# Altium PCB PCB1.PcbDoc (part 1 of 2)
Units mil, origin at the board's own origin, x right, y up, seen from the top; angles counter-clockwise.
Board outline 4538.24 x 3362.8 mil, 2 copper layers (Top Layer, Bottom Layer); 199 components, 229 nets, 1313 pads, 0 vias.
Unrouted connection lines stored in the file: 1024.
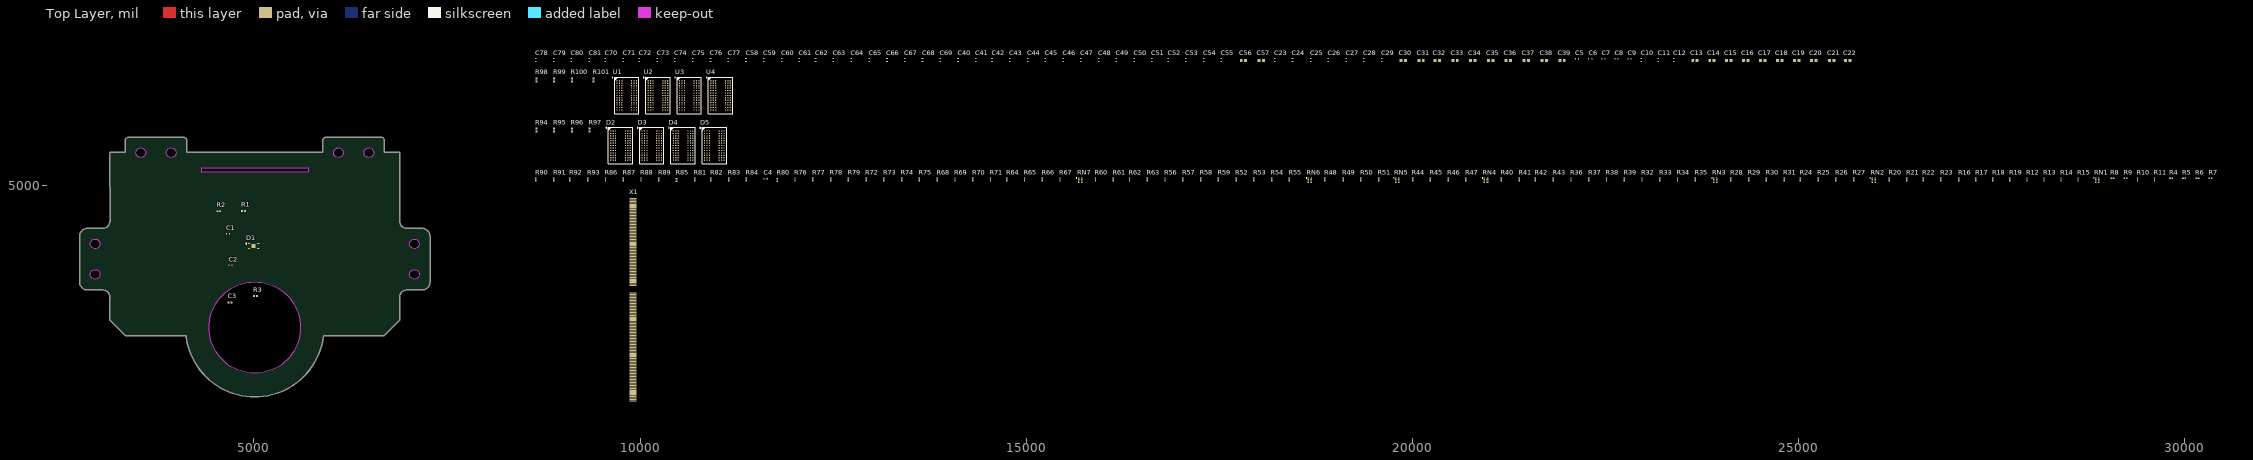
[diagram p0: Top Layer view]
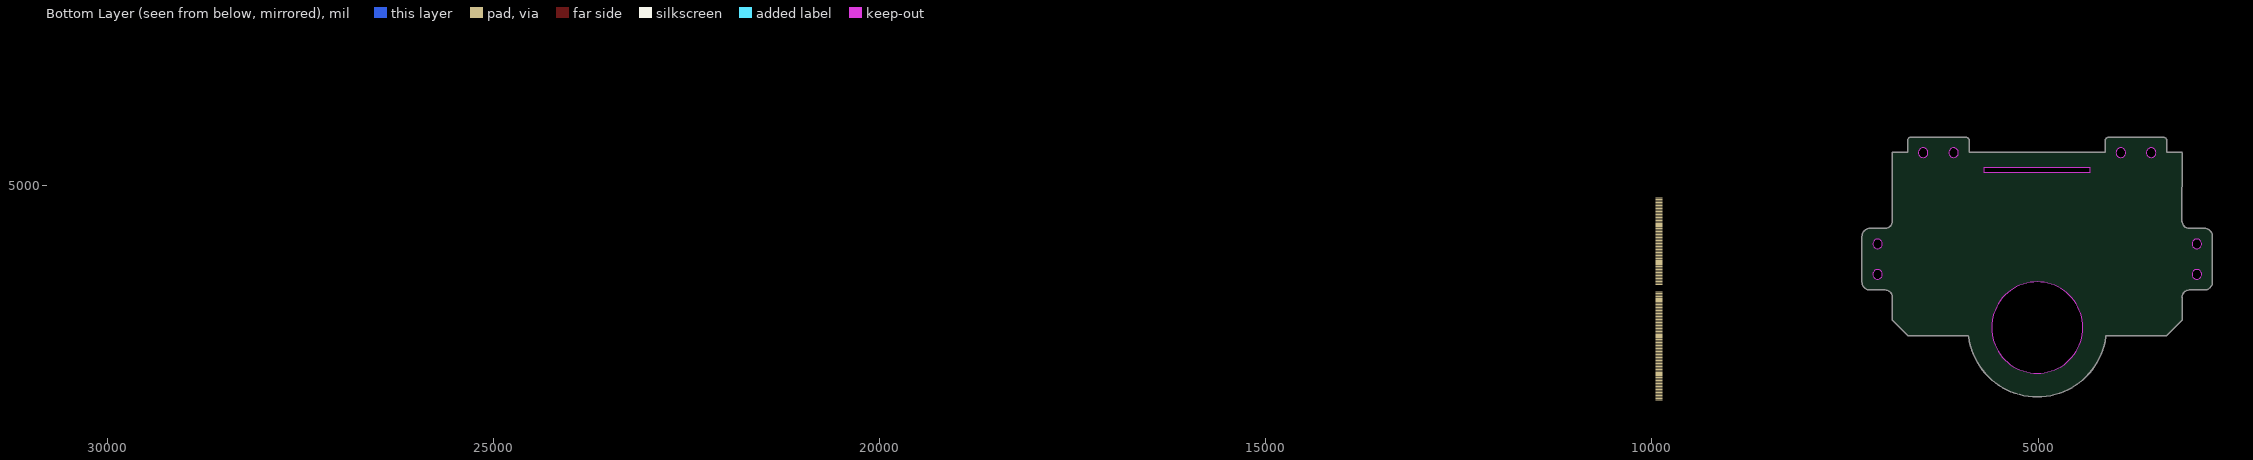
[diagram p1: Bottom Layer view, seen from below]

## Layer stack, top to bottom
Top Solder: solder mask 0.4, Solder Resist, Dk 3.5
Top Layer: signal copper 1.4
Dielectric1: dielectric 12.6, FR-4, Dk 4.8
Bottom Layer: signal copper 1.4
Bottom Solder: solder mask 0.4, Solder Resist, Dk 3.5

## Board outline
2846.65,3650.89 3040.36,3651.35 3058.98,3649.52 3076.88,3644.08 3093.38,3635.26 3107.84,3623.39 3119.71,3608.93 3128.53,3592.43 3133.97,3574.53 3135.8,3555.91 3135.34,3555.91 3134.93,3262.2 3136.52,3258.37 3136.54,3258.36 3136.83,3258.64 3333.66,3061.81 3333.36,3061.54 3333.37,3061.52 3337.21,3059.93 3337.21,3060.34 4119.99,3060.32 4121.33,3046.73 4130.89,2988.83 4144.22,2931.68 4161.25,2875.52 4181.92,2820.6 4206.14,2767.15 4233.81,2715.39 4264.79,2665.56 4298.98,2617.86 4336.2,2572.5 4376.32,2529.67 4419.15,2489.55 4464.51,2452.32 4512.21,2418.14 4562.05,2387.15 4613.8,2359.49 4667.25,2335.27 4722.18,2314.6 4778.33,2297.56 4835.48,2284.24 4893.38,2274.68 4951.78,2268.93 5010.43,2267.01 5069.09,2268.93 5127.49,2274.68 5185.39,2284.24 5242.54,2297.56 5298.69,2314.6 5353.61,2335.27 5407.07,2359.49 5458.82,2387.15 5508.65,2418.14 5556.35,2452.32 5601.72,2489.55 5644.55,2529.67 5684.66,2572.5 5721.89,2617.86 5756.07,2665.56 5787.06,2715.39 5814.72,2767.15 5838.94,2820.6 5859.62,2875.52 5876.65,2931.68 5889.98,2988.83 5899.53,3046.73 5900.87,3060.32 5900.74,3060.34 6683.66,3059.93 6687.5,3061.52 6687.51,3061.54 6687.22,3061.82 6884.06,3258.66 6884.32,3258.36 6884.35,3258.37 6885.94,3262.2 6885.53,3262.2 6885.07,3555.91 6886.9,3574.53 6892.33,3592.43 6901.15,3608.93 6913.02,3623.39 6927.49,3635.26 6943.99,3644.08 6961.89,3649.52 6980.51,3651.35 6980.51,3650.89 7174.21,3650.57 7190.69,3651.86 7206.76,3655.72 7222.04,3662.05 7236.13,3670.68 7248.7,3681.42 7259.44,3693.99 7268.07,3708.08 7274.4,3723.35 7278.26,3739.43 7279.55,3755.91 7279.23,3755.91 7279.55,4343.31 7278.26,4359.79 7274.4,4375.86 7268.07,4391.13 7259.44,4405.22 7248.7,4417.79 7236.13,4428.53 7222.04,4437.17 7206.76,4443.49 7190.69,4447.35 7174.21,4448.65 7174.21,4448.32 6980.51,4447.86 6961.89,4449.7 6943.99,4455.13 6927.49,4463.95 6913.02,4475.82 6901.15,4490.28 6892.33,4506.78 6886.9,4524.69 6885.07,4543.31 6885.53,4543.31 6885.94,5427.56 6884.35,5431.4 6880.51,5432.99 6880.51,5432.57 6688.68,5432.57 6689.06,5585.04 6687.53,5596.63 6683.06,5607.42 6675.95,5616.7 6666.68,5623.81 6655.88,5628.28 6644.29,5629.81 6644.29,5629.42 5935.63,5629.81 5924.04,5628.28 5913.25,5623.81 5903.97,5616.7 5896.86,5607.42 5892.39,5596.63 5890.86,5585.04 5891.25,5585.04 5891.25,5432.57 4129.62,5432.57 4130,5585.04 4128.48,5596.63 4124.01,5607.42 4116.89,5616.7 4107.62,5623.81 4096.82,5628.28 4085.24,5629.81 4085.24,5629.42 3376.58,5629.81 3364.99,5628.28 3354.19,5623.81 3344.92,5616.7 3337.81,5607.42 3333.33,5596.63 3331.81,5585.04 3332.19,5585.04 3332.19,5432.57 3140.36,5432.99 3136.52,5431.4 3134.93,5427.56 3135.34,5427.56 3135.8,4543.31 3133.97,4524.69 3128.53,4506.78 3119.71,4490.28 3107.84,4475.82 3093.38,4463.95 3076.88,4455.13 3058.98,4449.7 3040.36,4447.86 3040.36,4448.32 2846.65,4448.65 2830.18,4447.35 2814.1,4443.49 2798.83,4437.17 2784.74,4428.53 2772.17,4417.79 2761.43,4405.22 2752.8,4391.13 2746.47,4375.86 2742.61,4359.79 2741.31,4343.31 2741.64,4343.31 2741.31,3755.91 2742.61,3739.43 2746.47,3723.35 2752.8,3708.08 2761.43,3693.99 2772.17,3681.42 2784.74,3670.68 2798.83,3662.05 2814.1,3655.72 2830.18,3651.86 2846.65,3650.57
cut-out: 6499.01,5488.91 6510.75,5485.35 6521.56,5479.57 6531.04,5471.79 6538.82,5462.31 6544.6,5451.5 6548.16,5439.76 6549.36,5427.56 6548.16,5415.36 6544.6,5403.62 6538.82,5392.81 6531.04,5383.33 6521.56,5375.55 6510.75,5369.77 6499.01,5366.21 6486.81,5365.01 6474.61,5366.21 6462.87,5369.77 6452.06,5375.55 6442.58,5383.33 6434.8,5392.81 6429.02,5403.62 6425.46,5415.36 6424.26,5427.56 6425.46,5439.76 6429.02,5451.5 6434.8,5462.31 6442.58,5471.79 6452.06,5479.57 6462.87,5485.35 6474.61,5488.91 6486.81,5490.11
cut-out: 7089.57,4307.81 7101.3,4304.25 7112.11,4298.47 7121.59,4290.69 7129.37,4281.21 7135.15,4270.39 7138.71,4258.66 7139.91,4246.46 7138.71,4234.25 7135.15,4222.52 7129.37,4211.71 7121.59,4202.23 7112.11,4194.45 7101.3,4188.67 7089.57,4185.11 7077.36,4183.91 7065.16,4185.11 7053.43,4188.67 7042.61,4194.45 7033.13,4202.23 7025.35,4211.71 7019.57,4222.52 7016.01,4234.25 7014.81,4246.46 7016.01,4258.66 7019.57,4270.39 7025.35,4281.21 7033.13,4290.69 7042.61,4298.47 7053.43,4304.25 7065.16,4307.81 7077.36,4309.01
cut-out: 6105.31,5488.91 6117.05,5485.35 6127.86,5479.57 6137.34,5471.79 6145.12,5462.31 6150.9,5451.5 6154.46,5439.76 6155.66,5427.56 6154.46,5415.36 6150.9,5403.62 6145.12,5392.81 6137.34,5383.33 6127.86,5375.55 6117.05,5369.77 6105.31,5366.21 6093.11,5365.01 6080.91,5366.21 6069.17,5369.77 6058.36,5375.55 6048.88,5383.33 6041.1,5392.81 6035.32,5403.62 6031.76,5415.36 6030.56,5427.56 6031.76,5439.76 6035.32,5451.5 6041.1,5462.31 6048.88,5471.79 6058.36,5479.57 6069.17,5485.35 6080.91,5488.91 6093.11,5490.11
cut-out: 7089.57,3914.1 7101.3,3910.55 7112.11,3904.76 7121.59,3896.99 7129.37,3887.51 7135.15,3876.69 7138.71,3864.96 7139.91,3852.76 7138.71,3840.55 7135.15,3828.82 7129.37,3818 7121.59,3808.53 7112.11,3800.75 7101.3,3794.97 7089.57,3791.41 7077.36,3790.2 7065.16,3791.41 7053.43,3794.97 7042.61,3800.75 7033.13,3808.53 7025.35,3818 7019.57,3828.82 7016.01,3840.55 7014.81,3852.76 7016.01,3864.96 7019.57,3876.69 7025.35,3887.51 7033.13,3896.99 7042.61,3904.76 7053.43,3910.55 7065.16,3914.1 7077.36,3915.31
cut-out: 5056.8,3752.96 5102.89,3747.51 5148.4,3738.46 5193.06,3725.86 5236.6,3709.8 5278.75,3690.37 5319.23,3667.7 5357.82,3641.91 5394.26,3613.18 5428.34,3581.68 5459.84,3547.61 5488.57,3511.16 5514.35,3472.58 5537.02,3432.09 5556.45,3389.95 5572.51,3346.41 5585.11,3301.75 5594.16,3256.23 5599.62,3210.15 5601.44,3163.78 5599.62,3117.41 5594.16,3071.33 5585.11,3025.81 5572.51,2981.15 5556.45,2937.61 5537.02,2895.47 5514.35,2854.98 5488.57,2816.39 5459.84,2779.95 5428.34,2745.87 5394.26,2714.37 5357.82,2685.64 5319.23,2659.86 5278.75,2637.19 5236.6,2617.76 5193.06,2601.7 5148.4,2589.1 5102.89,2580.05 5056.8,2574.59 5010.43,2572.77 4964.06,2574.59 4917.98,2580.05 4872.47,2589.1 4827.8,2601.7 4784.27,2617.76 4742.12,2637.19 4701.63,2659.86 4663.05,2685.64 4626.61,2714.37 4592.53,2745.87 4561.03,2779.95 4532.3,2816.39 4506.52,2854.98 4483.84,2895.47 4464.41,2937.61 4448.35,2981.15 4435.76,3025.81 4426.7,3071.33 4421.25,3117.41 4419.43,3163.78 4421.25,3210.15 4426.7,3256.23 4435.76,3301.75 4448.35,3346.41 4464.41,3389.95 4483.84,3432.09 4506.52,3472.58 4532.3,3511.16 4561.03,3547.61 4592.53,3581.68 4626.61,3613.18 4663.05,3641.91 4701.63,3667.7 4742.12,3690.37 4784.27,3709.8 4827.8,3725.86 4872.47,3738.46 4917.98,3747.51 4964.06,3752.96 5010.43,3754.79
cut-out: 3939.96,5488.91 3951.69,5485.35 3962.51,5479.57 3971.99,5471.79 3979.77,5462.31 3985.55,5451.5 3989.11,5439.76 3990.31,5427.56 3989.11,5415.36 3985.55,5403.62 3979.77,5392.81 3971.99,5383.33 3962.51,5375.55 3951.69,5369.77 3939.96,5366.21 3927.76,5365.01 3915.55,5366.21 3903.82,5369.77 3893.01,5375.55 3883.53,5383.33 3875.75,5392.81 3869.97,5403.62 3866.41,5415.36 3865.21,5427.56 3866.41,5439.76 3869.97,5451.5 3875.75,5462.31 3883.53,5471.79 3893.01,5479.57 3903.82,5485.35 3915.55,5488.91 3927.76,5490.11
cut-out: 5699.41,5171.65 4321.46,5171.65 4321.46,5230.71 5699.41,5230.71
cut-out: 3546.26,5488.91 3557.99,5485.35 3568.81,5479.57 3578.29,5471.79 3586.06,5462.31 3591.85,5451.5 3595.4,5439.76 3596.61,5427.56 3595.4,5415.36 3591.85,5403.62 3586.06,5392.81 3578.29,5383.33 3568.81,5375.55 3557.99,5369.77 3546.26,5366.21 3534.06,5365.01 3521.85,5366.21 3510.12,5369.77 3499.3,5375.55 3489.83,5383.33 3482.05,5392.81 3476.27,5403.62 3472.71,5415.36 3471.5,5427.56 3472.71,5439.76 3476.27,5451.5 3482.05,5462.31 3489.83,5471.79 3499.3,5479.57 3510.12,5485.35 3521.85,5488.91 3534.06,5490.11
cut-out: 2955.71,3914.1 2967.44,3910.55 2978.26,3904.76 2987.73,3896.99 2995.51,3887.51 3001.29,3876.69 3004.85,3864.96 3006.06,3852.76 3004.85,3840.55 3001.29,3828.82 2995.51,3818 2987.73,3808.53 2978.26,3800.75 2967.44,3794.97 2955.71,3791.41 2943.5,3790.2 2931.3,3791.41 2919.57,3794.97 2908.75,3800.75 2899.27,3808.53 2891.5,3818 2885.72,3828.82 2882.16,3840.55 2880.95,3852.76 2882.16,3864.96 2885.72,3876.69 2891.5,3887.51 2899.27,3896.99 2908.75,3904.76 2919.57,3910.55 2931.3,3914.1 2943.5,3915.31
cut-out: 2955.71,4307.81 2967.44,4304.25 2978.26,4298.47 2987.73,4290.69 2995.51,4281.21 3001.29,4270.39 3004.85,4258.66 3006.06,4246.46 3004.85,4234.25 3001.29,4222.52 2995.51,4211.71 2987.73,4202.23 2978.26,4194.45 2967.44,4188.67 2955.71,4185.11 2943.5,4183.91 2931.3,4185.11 2919.57,4188.67 2908.75,4194.45 2899.27,4202.23 2891.5,4211.71 2885.72,4222.52 2882.16,4234.25 2880.95,4246.46 2882.16,4258.66 2885.72,4270.39 2891.5,4281.21 2899.27,4290.69 2908.75,4298.47 2919.57,4304.25 2931.3,4307.81 2943.5,4309.01

## Design rules (kind name [scope] priority, off if disabled: settings)
Clearance [All] p1: gap=5 ignorepadtopadclearanceinfootprint=FALSE except(0: Arc-Hole Track-Hole SMDPad-Hole THPad-Hole Via-Hole Fill-Hole Poly-Hole Region-Hole Text-Hole)
DiffPairsRouting [All] p1: maxlimit=10 minlimit=10 mostfreqgap=10 toplayer_minwidth=15 toplayer_maxwidth=15 toplayer_prefwidth=15 bottomlayer_minwidth=15 bottomlayer_maxwidth=15 bottomlayer_prefwidth=15 maxuncoupledlength=500
FabricationTestPointUsage TestPointUsage [All] p1: valid=0 allowmultiple=FALSE
FabricationTestpoint Testpoint [All] p1: side=3 testpointundercomponent=TRUE minsize=40 maxsize=100 preferedsize=60 minholesize=0 maxholesize=40 preferedholesize=32 testpointgrid=1 allowsidetop=TRUE allowsidebottom=TRUE usegrid=TRUE gridtolerance=0.01
PolygonConnect [All] p1: connectstyle=Relief reliefconductorwidth=10 reliefentries=4 polygonreliefangle="90 Angle" airgapwidth=10
RoutingVias [All] p1: holewidth=28 width=50 viastyle="Through Hole" minholewidth=28 minwidth=50 maxholewidth=28 maxwidth=50
SilkToSolderMaskClearance SilkscreenOverComponentPads [IsPad] p1: minsilkscreentomaskgap=10 clearancetoexposedcopper=TRUE
SolderMaskExpansion [All] p1: expansion=4 istentingtop=FALSE
Width [All] p1: maxlimit=10 minlimit=10 preferedwidth=10
26 further rules are at their usual default settings.

## Classes and differential pairs
differential pair DQS7: +DQS7_P -DQS7_N
differential pair DQS7R: +DQS7R_P -DQS7R_N
differential pair DQS6: +DQS6_P -DQS6_N
differential pair DQS6R: +DQS6R_P -DQS6R_N
differential pair DQS5: +DQS5_P -DQS5_N
differential pair DQS5R: +DQS5R_P -DQS5R_N
differential pair DQS4: +DQS4_P -DQS4_N
differential pair DQS4R: +DQS4R_P -DQS4R_N
differential pair DQS3: +DQS3_P -DQS3_N
differential pair DQS3R: +DQS3R_P -DQS3R_N
differential pair DQS2: +DQS2_P -DQS2_N
differential pair DQS2R: +DQS2R_P -DQS2R_N
differential pair DQS1: +DQS1_P -DQS1_N
differential pair DQS1R: +DQS1R_P -DQS1R_N
differential pair DQS0: +DQS0_P -DQS0_N
differential pair DQS0R: +DQS0R_P -DQS0R_N
differential pair CK1: +CK1_P -CK1_N
differential pair CK0: +CK0_P -CK0_N

## Components (designator, comment, footprint, x,y, rotation, side; value= is the part's Value field where it differs from the comment)
C1 "C1005C0G1H101K050BA" CAPC1005X55X10LL05 4665,4380 r0 top
C2 "C1005X7R1E104M" CAPC1005X55X10LL05 4695,3970 r0 top
C3 "GRM1555C1H3R3CA01D" CAPC1005X55X25NL5T10 4690,3490 r0 top
C4 "C1005X7R1E103M050BB" CAPC1005X55X10NL05 11625,5090 r0 top
C5 "C1005X7R1E104M" CAPC1005X55X10LL05 22130,6645 r0 top
C6 "C1005X7R1E104M" CAPC1005X55X10LL05 22300,6645 r0 top
C7 "C1005X7R1E104M" CAPC1005X55X10LL05 22470,6645 r0 top
C8 "C1005X7R1E104M" CAPC1005X55X10LL05 22640,6645 r0 top
C9 "C1005X7R1E104M" CAPC1005X55X10LL05 22810,6645 r0 top
C10 "C1005X7R1E104M" CAPC1005X55X10LL05 22960,6630 r90 top
C11 "C1005X7R1E104M" CAPC1005X55X10LL05 23180,6630 r90 top
C12 "C1005X7R1E104M" CAPC1005X55X10LL05 23380,6630 r90 top
C13 "GRM188R60J475KE19D" CAPC1608X90X35ML10T15 23655,6620 r0 top
C14 "GRM188R60J475KE19D" CAPC1608X90X35ML10T15 23875,6620 r0 top
C15 "GRM188R60J475KE19D" CAPC1608X90X35ML10T15 24095,6620 r0 top
C16 "GRM188R60J475KE19D" CAPC1608X90X35ML10T15 24315,6620 r0 top
C17 "GRM188R60J475KE19D" CAPC1608X90X35ML10T15 24535,6620 r0 top
C18 "GRM188R60J475KE19D" CAPC1608X90X35ML10T15 24755,6620 r0 top
C19 "GRM188R60J475KE19D" CAPC1608X90X35ML10T15 24975,6620 r0 top
C20 "GRM188R60J475KE19D" CAPC1608X90X35ML10T15 25195,6620 r0 top
C21 "GRM188R60J475KE19D" CAPC1608X90X35ML10T15 25425,6620 r0 top
C22 "GRM188R60J475KE19D" CAPC1608X90X35ML10T15 25635,6620 r0 top
C23 "CGB2A1X5R1E105K033BC" CAPC1005X33X10LL5 18215,6630 r90 top
C24 "CGB2A1X5R1E105K033BC" CAPC1005X33X10LL5 18445,6630 r90 top
C25 "CGB2A1X5R1E105K033BC" CAPC1005X33X10LL5 18680,6630 r90 top
C26 "CGB2A1X5R1E105K033BC" CAPC1005X33X10LL5 18910,6630 r90 top
C27 "CGB2A1X5R1E105K033BC" CAPC1005X33X10LL5 19140,6630 r90 top
C28 "CGB2A1X5R1E105K033BC" CAPC1005X33X10LL5 19370,6630 r90 top
C29 "CGB2A1X5R1E105K033BC" CAPC1005X33X10LL5 19600,6630 r90 top
C30 "GRM188R60J475KE19D" CAPC1608X90X35ML10T15 19880,6620 r0 top
C31 "GRM188R60J475KE19D" CAPC1608X90X35ML10T15 20110,6620 r0 top
C32 "GRM188R60J475KE19D" CAPC1608X90X35ML10T15 20320,6620 r0 top
C33 "GRM188R60J475KE19D" CAPC1608X90X35ML10T15 20550,6620 r0 top
C34 "GRM188R60J475KE19D" CAPC1608X90X35ML10T15 20780,6620 r0 top
C35 "GRM188R60J475KE19D" CAPC1608X90X35ML10T15 21010,6620 r0 top
C36 "GRM188R60J475KE19D" CAPC1608X90X35ML10T15 21240,6620 r0 top
C37 "GRM188R60J475KE19D" CAPC1608X90X35ML10T15 21470,6620 r0 top
C38 "GRM188R60J475KE19D" CAPC1608X90X35ML10T15 21705,6620 r0 top
C39 "GRM188R60J475KE19D" CAPC1608X90X35ML10T15 21935,6620 r0 top
C40 "CGB2A1X5R1E105K033BC" CAPC1005X33X10LL5 14115,6630 r90 top
C41 "CGB2A1X5R1E105K033BC" CAPC1005X33X10LL5 14345,6630 r90 top
C42 "CGB2A1X5R1E105K033BC" CAPC1005X33X10LL5 14555,6630 r90 top
C43 "CGB2A1X5R1E105K033BC" CAPC1005X33X10LL5 14785,6630 r90 top
C44 "CGB2A1X5R1E105K033BC" CAPC1005X33X10LL5 15015,6630 r90 top
C45 "CGB2A1X5R1E105K033BC" CAPC1005X33X10LL5 15245,6630 r90 top
C46 "CGB2A1X5R1E105K033BC" CAPC1005X33X10LL5 15475,6630 r90 top
C47 "CGB2A1X5R1E105K033BC" CAPC1005X33X10LL5 15705,6630 r90 top
C48 "CGB2A1X5R1E105K033BC" CAPC1005X33X10LL5 15935,6630 r90 top
C49 "CGB2A1X5R1E105K033BC" CAPC1005X33X10LL5 16165,6630 r90 top
C50 "CGB2A1X5R1E105K033BC" CAPC1005X33X10LL5 16395,6630 r90 top
C51 "CGB2A1X5R1E105K033BC" CAPC1005X33X10LL5 16625,6630 r90 top
C52 "CGB2A1X5R1E105K033BC" CAPC1005X33X10LL5 16835,6630 r90 top
C53 "CGB2A1X5R1E105K033BC" CAPC1005X33X10LL5 17065,6630 r90 top
C54 "CGB2A1X5R1E105K033BC" CAPC1005X33X10LL5 17295,6630 r90 top
C55 "CGB2A1X5R1E105K033BC" CAPC1005X33X10LL5 17525,6630 r90 top
C56 "GRM188R60J475KE19D" CAPC1608X90X35ML10T15 17810,6620 r0 top
C57 "GRM188R60J475KE19D" CAPC1608X90X35ML10T15 18040,6620 r0 top
C58 "CGB2A1X5R1E105K033BC" CAPC1005X33X10LL5 11370,6630 r90 top
C59 "CGB2A1X5R1E105K033BC" CAPC1005X33X10LL5 11600,6630 r90 top
C60 "CGB2A1X5R1E105K033BC" CAPC1005X33X10LL5 11830,6630 r90 top
C61 "CGB2A1X5R1E105K033BC" CAPC1005X33X10LL5 12060,6630 r90 top
C62 "CGB2A1X5R1E105K033BC" CAPC1005X33X10LL5 12270,6630 r90 top
C63 "CGB2A1X5R1E105K033BC" CAPC1005X33X10LL5 12500,6630 r90 top
C64 "CGB2A1X5R1E105K033BC" CAPC1005X33X10LL5 12735,6630 r90 top
C65 "CGB2A1X5R1E105K033BC" CAPC1005X33X10LL5 12965,6630 r90 top
C66 "CGB2A1X5R1E105K033BC" CAPC1005X33X10LL5 13195,6630 r90 top
C67 "CGB2A1X5R1E105K033BC" CAPC1005X33X10LL5 13425,6630 r90 top
C68 "CGB2A1X5R1E105K033BC" CAPC1005X33X10LL5 13655,6630 r90 top
C69 "CGB2A1X5R1E105K033BC" CAPC1005X33X10LL5 13885,6630 r90 top
C70 "CGB2A1X5R1E105K033BC" CAPC1005X33X10LL5 9550,6630 r90 top
C71 "CGB2A1X5R1E105K033BC" CAPC1005X33X10LL5 9780,6630 r90 top
C72 "CGB2A1X5R1E105K033BC" CAPC1005X33X10LL5 9990,6630 r90 top
C73 "CGB2A1X5R1E105K033BC" CAPC1005X33X10LL5 10220,6630 r90 top
C74 "CGB2A1X5R1E105K033BC" CAPC1005X33X10LL5 10450,6630 r90 top
C75 "CGB2A1X5R1E105K033BC" CAPC1005X33X10LL5 10680,6630 r90 top
C76 "CGB2A1X5R1E105K033BC" CAPC1005X33X10LL5 10910,6630 r90 top
C77 "CGB2A1X5R1E105K033BC" CAPC1005X33X10LL5 11140,6630 r90 top
C78 "CGB2A1X5R1E105K033BC" CAPC1005X33X10LL5 8650,6630 r90 top
C79 "CGB2A1X5R1E105K033BC" CAPC1005X33X10LL5 8880,6630 r90 top
C80 "CGB2A1X5R1E105K033BC" CAPC1005X33X10LL5 9110,6630 r90 top
C81 "CGB2A1X5R1E105K033BC" CAPC1005X33X10LL5 9340,6630 r90 top
D1 "MCP98244" MCHP-TDFN-MNY8_V 4995,4220 r0 top
D2 "MT40A1G8WE-083E:B" MICT-WE-78 9745,5520 r0 top
D3 "MT40A1G8WE-083E:B" MICT-WE-78 10150,5520 r0 top
D4 "MT40A1G8WE-083E:B" MICT-WE-78 10555,5520 r0 top
D5 "MT40A1G8WE-083E:B" MICT-WE-78 10960,5520 r0 top
R1 "RC0402JR-07120RL" RESC1005X40X25ML5T10 4865,4675 r0 top
R2 "RC0402JR-0739RL" RESC1005X40X25NL5T10 4545,4670 r0 top
R3 "ERJ-2GEJ750X" RESC1005X40X25ML05T05 5020,3570 r0 top
R4 "ERJ-1GEJ150C" RESC0603X26X15ML03T05 29820,5095 r0 top
R5 "ERJ-1GEJ150C" RESC0603X26X15ML03T05 29990,5095 r0 top
R6 "ERJ-1GEJ150C" RESC0603X26X15ML03T05 30160,5095 r0 top
R7 "ERJ-1GEJ150C" RESC0603X26X15ML03T05 30330,5095 r0 top
R8 "ERJ-1GEJ150C" RESC0603X26X15ML03T05 29060,5095 r0 top
R9 "ERJ-1GEJ150C" RESC0603X26X15ML03T05 29230,5095 r0 top
R10 "ERJ-1GEJ150C" RESC0603X26X15ML03T05 29385,5080 r90 top
R11 "ERJ-1GEJ150C" RESC0603X26X15ML03T05 29605,5080 r90 top
R12 "ERJ-1GEJ150C" RESC0603X26X15ML03T05 27955,5080 r90 top
R13 "ERJ-1GEJ150C" RESC0603X26X15ML03T05 28175,5080 r90 top
R14 "ERJ-1GEJ150C" RESC0603X26X15ML03T05 28395,5080 r90 top
R15 "ERJ-1GEJ150C" RESC0603X26X15ML03T05 28615,5080 r90 top
R16 "ERJ-1GEJ150C" RESC0603X26X15ML03T05 27070,5080 r90 top
R17 "ERJ-1GEJ150C" RESC0603X26X15ML03T05 27290,5080 r90 top
R18 "ERJ-1GEJ150C" RESC0603X26X15ML03T05 27510,5080 r90 top
R19 "ERJ-1GEJ150C" RESC0603X26X15ML03T05 27730,5080 r90 top
R20 "ERJ-1GEJ150C" RESC0603X26X15ML03T05 26170,5080 r90 top
R21 "ERJ-1GEJ150C" RESC0603X26X15ML03T05 26400,5080 r90 top
R22 "ERJ-1GEJ150C" RESC0603X26X15ML03T05 26610,5080 r90 top
R23 "ERJ-1GEJ150C" RESC0603X26X15ML03T05 26840,5080 r90 top
R24 "ERJ-1GEJ150C" RESC0603X26X15ML03T05 25020,5080 r90 top
R25 "ERJ-1GEJ150C" RESC0603X26X15ML03T05 25250,5080 r90 top
R26 "ERJ-1GEJ150C" RESC0603X26X15ML03T05 25480,5080 r90 top
R27 "ERJ-1GEJ150C" RESC0603X26X15ML03T05 25710,5080 r90 top
R28 "ERJ-1GEJ150C" RESC0603X26X15ML03T05 24120,5080 r90 top
R29 "ERJ-1GEJ150C" RESC0603X26X15ML03T05 24350,5080 r90 top
R30 "ERJ-1GEJ150C" RESC0603X26X15ML03T05 24580,5080 r90 top
R31 "ERJ-1GEJ150C" RESC0603X26X15ML03T05 24810,5080 r90 top
R32 "ERJ-1GEJ150C" RESC0603X26X15ML03T05 22970,5080 r90 top
R33 "ERJ-1GEJ150C" RESC0603X26X15ML03T05 23200,5080 r90 top
R34 "ERJ-1GEJ150C" RESC0603X26X15ML03T05 23430,5080 r90 top
R35 "ERJ-1GEJ150C" RESC0603X26X15ML03T05 23660,5080 r90 top
R36 "ERJ-1GEJ150C" RESC0603X26X15ML03T05 22050,5080 r90 top
R37 "ERJ-1GEJ150C" RESC0603X26X15ML03T05 22280,5080 r90 top
R38 "ERJ-1GEJ150C" RESC0603X26X15ML03T05 22510,5080 r90 top
R39 "ERJ-1GEJ150C" RESC0603X26X15ML03T05 22740,5080 r90 top
R40 "ERJ-1GEJ150C" RESC0603X26X15ML03T05 21150,5080 r90 top
R41 "ERJ-1GEJ150C" RESC0603X26X15ML03T05 21380,5080 r90 top
R42 "ERJ-1GEJ150C" RESC0603X26X15ML03T05 21590,5080 r90 top
R43 "ERJ-1GEJ150C" RESC0603X26X15ML03T05 21820,5080 r90 top
R44 "ERJ-1GEJ150C" RESC0603X26X15ML03T05 20000,5080 r90 top
R45 "ERJ-1GEJ150C" RESC0603X26X15ML03T05 20230,5080 r90 top
R46 "ERJ-1GEJ150C" RESC0603X26X15ML03T05 20460,5080 r90 top
R47 "ERJ-1GEJ150C" RESC0603X26X15ML03T05 20690,5080 r90 top
R48 "ERJ-1GEJ150C" RESC0603X26X15ML03T05 18865,5080 r90 top
R49 "ERJ-1GEJ150C" RESC0603X26X15ML03T05 19100,5080 r90 top
R50 "ERJ-1GEJ150C" RESC0603X26X15ML03T05 19330,5080 r90 top
R51 "ERJ-1GEJ150C" RESC0603X26X15ML03T05 19560,5080 r90 top
R52 "ERJ-1GEJ150C" RESC0603X26X15ML03T05 17715,5080 r90 top
R53 "ERJ-1GEJ150C" RESC0603X26X15ML03T05 17945,5080 r90 top
R54 "ERJ-1GEJ150C" RESC0603X26X15ML03T05 18175,5080 r90 top
R55 "ERJ-1GEJ150C" RESC0603X26X15ML03T05 18405,5080 r90 top
R56 "ERJ-1GEJ150C" RESC0603X26X15ML03T05 16795,5080 r90 top
R57 "ERJ-1GEJ150C" RESC0603X26X15ML03T05 17025,5080 r90 top
R58 "ERJ-1GEJ150C" RESC0603X26X15ML03T05 17255,5080 r90 top
R59 "ERJ-1GEJ150C" RESC0603X26X15ML03T05 17485,5080 r90 top
R60 "ERJ-1GEJ150C" RESC0603X26X15ML03T05 15895,5080 r90 top
R61 "ERJ-1GEJ150C" RESC0603X26X15ML03T05 16125,5080 r90 top
R62 "ERJ-1GEJ150C" RESC0603X26X15ML03T05 16335,5080 r90 top
R63 "ERJ-1GEJ150C" RESC0603X26X15ML03T05 16565,5080 r90 top
R64 "ERJ-1GEJ150C" RESC0603X26X15ML03T05 14745,5080 r90 top
R65 "ERJ-1GEJ150C" RESC0603X26X15ML03T05 14975,5080 r90 top
R66 "ERJ-1GEJ150C" RESC0603X26X15ML03T05 15205,5080 r90 top
R67 "ERJ-1GEJ150C" RESC0603X26X15ML03T05 15435,5080 r90 top
R68 "ERJ-1GEJ150C" RESC0603X26X15ML03T05 13845,5080 r90 top
R69 "ERJ-1GEJ150C" RESC0603X26X15ML03T05 14075,5080 r90 top
R70 "ERJ-1GEJ150C" RESC0603X26X15ML03T05 14305,5080 r90 top
R71 "ERJ-1GEJ150C" RESC0603X26X15ML03T05 14535,5080 r90 top
R72 "ERJ-1GEJ150C" RESC0603X26X15ML03T05 12925,5080 r90 top
R73 "ERJ-1GEJ150C" RESC0603X26X15ML03T05 13155,5080 r90 top
R74 "ERJ-1GEJ150C" RESC0603X26X15ML03T05 13385,5080 r90 top
R75 "ERJ-1GEJ150C" RESC0603X26X15ML03T05 13615,5080 r90 top
R76 "ERJ-1GEJ150C" RESC0603X26X15ML03T05 12005,5080 r90 top
R77 "ERJ-1GEJ150C" RESC0603X26X15ML03T05 12235,5080 r90 top
R78 "ERJ-1GEJ150C" RESC0603X26X15ML03T05 12465,5080 r90 top
R79 "ERJ-1GEJ150C" RESC0603X26X15ML03T05 12695,5080 r90 top
R80 "RC0402JR-0730RL" RESC1005X40X25NL5T10 11775,5075 r90 top
R81 "ERJ-1GEJ150C" RESC0603X26X15ML03T05 10705,5080 r90 top
R82 "ERJ-1GEJ150C" RESC0603X26X15ML03T05 10915,5080 r90 top
R83 "ERJ-1GEJ150C" RESC0603X26X15ML03T05 11145,5080 r90 top
R84 "ERJ-1GEJ150C" RESC0603X26X15ML03T05 11375,5080 r90 top
R85 "RC0402JR-0730RL" RESC1005X40X25NL5T10 10470,5075 r90 top
R86 "ERJ-1GEJ150C" RESC0603X26X15ML03T05 9550,5080 r90 top
R87 "ERJ-1GEJ150C" RESC0603X26X15ML03T05 9780,5080 r90 top
R88 "ERJ-1GEJ150C" RESC0603X26X15ML03T05 10010,5080 r90 top
R89 "ERJ-1GEJ150C" RESC0603X26X15ML03T05 10240,5080 r90 top
R90 "ERJ-1GEJ150C" RESC0603X26X15ML03T05 8650,5080 r90 top
R91 "ERJ-1GEJ150C" RESC0603X26X15ML03T05 8880,5080 r90 top
R92 "ERJ-1GEJ150C" RESC0603X26X15ML03T05 9090,5080 r90 top
R93 "ERJ-1GEJ150C" RESC0603X26X15ML03T05 9320,5080 r90 top
R94 "ERJ-2GEJ241x" RESC1005X40X25ML05T05 8655,5720 r90 top
R95 "ERJ-2GEJ241x" RESC1005X40X25ML05T05 8885,5720 r90 top
R96 "ERJ-2GEJ241x" RESC1005X40X25ML05T05 9115,5720 r90 top
R97 "ERJ-2GEJ241x" RESC1005X40X25ML05T05 9345,5720 r90 top
R98 "ERJ-2GEJ241x" RESC1005X40X25ML05T05 8655,6370 r90 top
R99 "ERJ-2GEJ241x" RESC1005X40X25ML05T05 8885,6370 r90 top
R100 "ERJ-2GEJ241x" RESC1005X40X25ML05T05 9115,6370 r90 top
R101 "ERJ-2GEJ241x" RESC1005X40X25ML05T05 9395,6370 r90 top
RN1 "CAY10-360J4LF" BOUR-CAY10-J4_V 28865,5070 r0 top
RN2 "CAY10-360J4LF" BOUR-CAY10-J4_V 25970,5070 r0 top
RN3 "CAY10-360J4LF" BOUR-CAY10-J4_V 23920,5070 r0 top
RN4 "CAY10-360J4LF" BOUR-CAY10-J4_V 20950,5070 r0 top
RN5 "CAY10-360J4LF" BOUR-CAY10-J4_V 19800,5070 r0 top
RN6 "CAY10-360J4LF" BOUR-CAY10-J4_V 18670,5070 r0 top
RN7 "CAY10-360J4LF" BOUR-CAY10-J4_V 15695,5070 r0 top
U1 "MT40A1G8WE-083E:B" MICT-WE-78 9825,6170 r0 top
U2 "MT40A1G8WE-083E:B" MICT-WE-78 10230,6170 r0 top
U3 "MT40A1G8WE-083E:B" MICT-WE-78 10635,6170 r0 top
U4 "MT40A1G8WE-083E:B" MICT-WE-78 11040,6170 r0 top
X1 "SODIMM-CN-2P-M-R260" SODIMM-GF-2D-500-1K-S260 9905,2215 r90 top

## Footprints (in the part's own frame and the unit in brackets; to place one, negate y for a bottom-side part, rotate by r counter-clockwise, add the part's x,y. Pads: shape width x height; smd on the part's side, far side on the other; paste and mask are expansions set on the pad)
BOUR-CAY10-J4_V [mm] "SMD, 8-Leads, Body 2x1mm, Pitch 0.5mm"
  rect 0.5x0.4 smd: 1(-0.5,0.75) 4(-0.5,-0.75) 5(0.5,-0.75) 8(0.5,0.75)
  rect 0.5x0.3 smd: 2(-0.5,0.25) 3(-0.5,-0.25) 6(0.5,-0.25) 7(0.5,0.25)
  silkscreen extent -1.2,0.7 -1.1,0.8, body extent -0.5,-1 0.5,1, height 0.35
CAPC1005X33X10LL5 [mm] "Chip Capacitor, 2-Leads, Body 1.05x0.55mm, IPC High Density"
  rect 0.32x0.52 smd: 1(-0.5,0) 2(0.5,0)
  body extent -0.53,-0.28 0.53,0.28, height 0.33
CAPC1005X55X10LL05 [mm] "Chip Capacitor, 2-Leads, Body 1.05x0.55mm, IPC High Density"
  rect 0.32x0.52 smd: 1(-0.5,0) 2(0.5,0)
  body extent -0.53,-0.28 0.53,0.28, height 0.55
CAPC1005X55X10NL05 [mm] "Chip Capacitor, 2-Leads, Body 1.05x0.55mm, IPC Medium Density"
  rect 0.42x0.62 smd: 1(-0.55,0) 2(0.55,0)
  body extent -0.53,-0.28 0.53,0.28, height 0.55
CAPC1005X55X25NL5T10 [mm] "Chip Capacitor, 2-Leads, Body 1.05x0.55mm, IPC Medium Density"
  rect 0.66x0.62 smd: 1(-0.44,0) 2(0.44,0)
  body extent -0.53,-0.28 0.53,0.28, height 0.55
CAPC1608X90X35ML10T15 [mm] "Chip Capacitor, 2-Leads, Body 1.7x0.9mm, IPC Low Density"
  rect 0.95x1.05 smd: 1(-0.725,0) 2(0.725,0)
  body extent -0.85,-0.45 0.85,0.45, height 0.9
MCHP-TDFN-MNY8_V [mm] "SON, , Body 3x2mm, Pitch 0.5mm"
  rect 0.75x0.3 smd: 1(-1.5,0.75) 2(-1.5,0.25) 3(-1.5,-0.25) 4(-1.5,-0.75) 5(1.5,-0.75) 6(1.5,-0.25) 7(1.5,0.25) 8(1.5,0.75)
  rect 1.36x1.46 smd: 9(0,0)
  silkscreen extent -2.55,0.63 -2.3,0.87, body extent -1.5,-1 1.5,1, height 0.8
MICT-WE-78 [mm] "BGA, 78-Leads, Body 8.00x12.00mm, Pitch 0.80mm"
  round 0.4 smd: A1(-3.2,4.8) A2(-2.4,4.8) A3(-1.6,4.8) A7(1.6,4.8) A8(2.4,4.8) A9(3.2,4.8) B1(-3.2,4) B2(-2.4,4) B3(-1.6,4) B7(1.6,4) B8(2.4,4) B9(3.2,4) C1(-3.2,3.2) C2(-2.4,3.2) C3(-1.6,3.2) C7(1.6,3.2) C8(2.4,3.2) C9(3.2,3.2) D1(-3.2,2.4) D2(-2.4,2.4) D3(-1.6,2.4) D7(1.6,2.4) D8(2.4,2.4) D9(3.2,2.4) E1(-3.2,1.6) E2(-2.4,1.6) E3(-1.6,1.6) E7(1.6,1.6) E8(2.4,1.6) E9(3.2,1.6) F1(-3.2,0.8) F2(-2.4,0.8) F3(-1.6,0.8) F7(1.6,0.8) F8(2.4,0.8) F9(3.2,0.8) G1(-3.2,0) G2(-2.4,0) G3(-1.6,0) G7(1.6,0) G8(2.4,0) G9(3.2,0) H1(-3.2,-0.8) H2(-2.4,-0.8) H3(-1.6,-0.8) H7(1.6,-0.8) H8(2.4,-0.8) H9(3.2,-0.8) J1(-3.2,-1.6) J2(-2.4,-1.6) J3(-1.6,-1.6) J7(1.6,-1.6) J8(2.4,-1.6) J9(3.2,-1.6) K1(-3.2,-2.4) K2(-2.4,-2.4) K3(-1.6,-2.4) K7(1.6,-2.4) K8(2.4,-2.4) K9(3.2,-2.4) L1(-3.2,-3.2) L2(-2.4,-3.2) L3(-1.6,-3.2) L7(1.6,-3.2) L8(2.4,-3.2) L9(3.2,-3.2) M1(-3.2,-4) M2(-2.4,-4) M3(-1.6,-4) M7(1.6,-4) M8(2.4,-4) M9(3.2,-4) N1(-3.2,-4.8) N2(-2.4,-4.8) N3(-1.6,-4.8) N7(1.6,-4.8) N8(2.4,-4.8) N9(3.2,-4.8)
  silkscreen extent -4.77,-6 4,6, body extent -4,-6 4,6, height 1.2
RESC0603X26X15ML03T05 [mm] "Chip Resistor, 2-Leads, Body 0.63x0.33mm, IPC Low Density"
  rect 0.55x0.45 smd: 1(-0.375,0) 2(0.375,0)
  body extent -0.31,-0.16 0.32,0.17, height 0.26
RESC1005X40X25ML05T05 [mm] "Chip Resistor, 2-Leads, Body 1.05x0.55mm, IPC Low Density"
  rect 0.65x0.65 smd: 1(-0.5,0) 2(0.5,0)
  body extent -0.53,-0.28 0.53,0.28, height 0.4
RESC1005X40X25ML5T10 [mm] "Chip Resistor, 2-Leads, Body 1.05x0.55mm, IPC Low Density"
  rect 0.7x0.65 smd: 1(-0.475,0) 2(0.475,0)
  body extent -0.53,-0.28 0.53,0.28, height 0.4
RESC1005X40X25NL5T10 [mm] "Chip Resistor, 2-Leads, Body 1.05x0.55mm, IPC Medium Density"
  rect 0.6x0.55 smd: 1(-0.425,0) 2(0.425,0)
  body extent -0.53,-0.28 0.53,0.28, height 0.4
SODIMM-GF-2D-500-1K-S260 [mm] "Golden finger, SODIMM, Dual, Staggered, Pitch 0.5mm, 260-Position"
  rect 0.35x2.25 smd paste-0.75 mask+0.3: 1(0,0) 3(0.5,0) 5(1,0) 7(1.5,0) 9(2,0) 11(2.5,0) 13(3,0) 15(3.5,0) 17(4,0) 19(4.5,0) 21(5,0) 23(5.5,0) 25(6,0) 27(6.5,0) 29(7,0) 31(7.5,0) 33(8,0) 35(8.5,0) 37(9,0) 39(9.5,0) 41(10,0) 43(10.5,0) 45(11,0) 47(11.5,0) 49(12,0) 51(12.5,0) 53(13,0) 55(13.5,0) 57(14,0) 59(14.5,0) 61(15,0) 63(15.5,0) 65(16,0) 67(16.5,0) 69(17,0) 71(17.5,0) 73(18,0) 75(18.5,0) 77(19,0) 79(19.5,0) 81(20,0) 83(20.5,0) 85(21,0) 87(21.5,0) 89(22,0) 91(22.5,0) 93(23,0) 95(23.5,0) 97(24,0) 99(24.5,0) 101(25,0) 103(25.5,0) 105(26,0) 107(26.5,0) 109(27,0) 111(27.5,0) 113(28,0) 115(28.5,0) 117(29,0) 119(29.5,0) 121(30,0) 123(30.5,0) 125(31,0) 127(31.5,0) 129(32,0) 131(32.5,0) 133(33,0) 135(33.5,0) 137(34,0) 139(34.5,0) 141(35,0) 143(35.5,0) 145(38,0) 147(38.5,0) 149(39,0) 151(39.5,0) 153(40,0) 155(40.5,0) 157(41,0) 159(41.5,0) 161(42,0) 163(42.5,0) 165(43,0) 167(43.5,0) 169(44,0) 171(44.5,0) 173(45,0) 175(45.5,0) 177(46,0) 179(46.5,0) 181(47,0) 183(47.5,0) 185(48,0) 187(48.5,0) 189(49,0) 191(49.5,0) 193(50,0) 195(50.5,0) 197(51,0) 199(51.5,0) 201(52,0) 203(52.5,0) 205(53,0) 207(53.5,0) 209(54,0) 211(54.5,0) 213(55,0) 215(55.5,0) 217(56,0) 219(56.5,0) 221(57,0) 223(57.5,0) 225(58,0) 227(58.5,0) 229(59,0) 231(59.5,0) 233(60,0) 235(60.5,0) 237(61,0) 239(61.5,0) 241(62,0) 243(62.5,0) 245(63,0) 247(63.5,0) 249(64,0) 251(64.5,0) 253(65,0) 255(65.5,0) 257(66,0) 259(66.5,0)
  rect 0.35x2.25 smd far side paste-0.75 mask+0.3: 2(0.25,0) 4(0.75,0) 6(1.25,0) 8(1.75,0) 10(2.25,0) 12(2.75,0) 14(3.25,0) 16(3.75,0) 18(4.25,0) 20(4.75,0) 22(5.25,0) 24(5.75,0) 26(6.25,0) 28(6.75,0) 30(7.25,0) 32(7.75,0) 34(8.25,0) 36(8.75,0) 38(9.25,0) 40(9.75,0) 42(10.25,0) 44(10.75,0) 46(11.25,0) 48(11.75,0) 50(12.25,0) 52(12.75,0) 54(13.25,0) 56(13.75,0) 58(14.25,0) 60(14.75,0) 62(15.25,0) 64(15.75,0) 66(16.25,0) 68(16.75,0) 70(17.25,0) 72(17.75,0) 74(18.25,0) 76(18.75,0) 78(19.25,0) 80(19.75,0) 82(20.25,0) 84(20.75,0) 86(21.25,0) 88(21.75,0) 90(22.25,0) 92(22.75,0) 94(23.25,0) 96(23.75,0) 98(24.25,0) 100(24.75,0) 102(25.25,0) 104(25.75,0) 106(26.25,0) 108(26.75,0) 110(27.25,0) 112(27.75,0) 114(28.25,0) 116(28.75,0) 118(29.25,0) 120(29.75,0) 122(30.25,0) 124(30.75,0) 126(31.25,0) 128(31.75,0) 130(32.25,0) 132(32.75,0) 134(33.25,0) 136(33.75,0) 138(34.25,0) 140(34.75,0) 142(35.25,0) 144(35.75,0) 146(38.25,0) 148(38.75,0) 150(39.25,0) 152(39.75,0) 154(40.25,0) 156(40.75,0) 158(41.25,0) 160(41.75,0) 162(42.25,0) 164(42.75,0) 166(43.25,0) 168(43.75,0) 170(44.25,0) 172(44.75,0) 174(45.25,0) 176(45.75,0) 178(46.25,0) 180(46.75,0) 182(47.25,0) 184(47.75,0) 186(48.25,0) 188(48.75,0) 190(49.25,0) 192(49.75,0) 194(50.25,0) 196(50.75,0) 198(51.25,0) 200(51.75,0) 202(52.25,0) 204(52.75,0) 206(53.25,0) 208(53.75,0) 210(54.25,0) 212(54.75,0) 214(55.25,0) 216(55.75,0) 218(56.25,0) 220(56.75,0) 222(57.25,0) 224(57.75,0) 226(58.25,0) 228(58.75,0) 230(59.25,0) 232(59.75,0) 234(60.25,0) 236(60.75,0) 238(61.25,0) 240(61.75,0) 242(62.25,0) 244(62.75,0) 246(63.25,0) 248(63.75,0) 250(64.25,0) 252(64.75,0) 254(65.25,0) 256(65.75,0) 258(66.25,0) 260(66.75,0)

## Part data
C1: library part CMP-1663-00011-2, "Chip Capacitor, 100 pF, +/- 10%, 50 V, -55 to 125 degC, 0402 (1005 Metric), RoHS, Tape and Reel", Capacitance="100 pF", Case/Package=0402, Max Operating Temperature="125 degC", Min Operating Temperature="-55 degC", Package Quantity=10000, Tolerance=10%, Voltage Rating="50 V", ComponentLink1Description="Manufacturer URL", ComponentLink1URL=http://www.tdk.com/, ComponentLink2Description=Datasheet, ComponentLink2URL=http://datasheet.octopart.com/C-Series-Ceramic-Chip-Capacitors-TDK-datasheet-family-84.pdf, DatasheetVersion=04/2012, Mount="Surface Mount", Mounting Technology="Surface Mount", PackageDescription="2-Pin Surface Mount Device, Body 1 x 0.5 mm", Packaging="Tape and Reel", PartNumber=C1005C0G1H101K050BA, RoHSCompliant=true
C2 C5 C6 C7 C8 C9 C10 C11 C12: library part CMP-1663-00009-2, "Chip Capacitor, 0.1 uF, +/- 20%, 25 V, -55 to 125 degC, 0402 (1005 Metric), RoHS, Tape and Reel", Capacitance="100 nF", Case Code (Imperial)=0402, Case Code (Metric)=1005, Max Operating Temperature="125 degC", Min Operating Temperature="-55 degC", Package Quantity=10000, Tolerance=20%, Type (Capacitors)=X7R, Voltage Rating="25 V", Case\/Package=0402, ComponentLink1Description="Manufacturer URL", ComponentLink1URL=http://www.tdk.com/, ComponentLink2Description=Datasheet, ComponentLink2URL=http://www.farnell.com/datasheets/1571323.pdf, DatasheetVersion=09/2011, Height="0.5 mm", Length="1 mm", Mount="Surface Mount", Mounting Technology="Surface Mount", PackageDescription="2-Pin Surface Mount Device, Body 1 x 0.5 mm", PackageReference=0402, Packaging="Tape and Reel", PartNumber=C1005X7R1E104M, Pins=2, RoHSCompliant=true, Voltage Rating (DC)="25 V", Width="0.5 mm"
C3: library part CMP-2008-04352-2, "Chip Capacitor, 3.3 pF, +/- 0.25 pF, 50 V, -55 to 125 degC, 0402 (1005 Metric), RoHS, Tape and Reel", Capacitance="3.3 pF", Case Code (Imperial)=0402, Case Code (Metric)=1005, Max Operating Temperature="125 degC", Min Operating Temperature="-55 degC", Package Quantity=10000, Type (Capacitors)=C0G, Voltage Rating="50 V", Case/Package=0402, ComponentLink1Description="Manufacturer URL", ComponentLink1URL=http://www.murata.com/, ComponentLink2Description=Datasheet, ComponentLink2URL=http://search.murata.co.jp/Ceramy/image/img/A01X/G101/ENG/GRM1555C1H3R3CA01-01.pdf, DatasheetVersion=03/2016, Height="0.5 mm", Length="0.039 inch", Mount="Surface Mount", Mounting Technology="Surface Mount", PackageDescription="2-Pin Surface Mount Device, Body 1 x 0.5 mm", Packaging="Tape and Reel", PartNumber=GRM1555C1H3R3CA01D, Radiation Hardening=No, REACH SVHC="No SVHC", RoHSCompliant=true, Voltage Rating (DC)="50 V", Width="0.02 inch"
C4: library part CMP-1663-00012-1, "Chip Capacitor, 10 nF, +/- 15%, 25 V, -55 to 125 degC, 0402 (1005 Metric), RoHS, Tape and Reel", Capacitance="10 nF", Case Code (Imperial)=0402, Case Code (Metric)=1005, Max Operating Temperature="125 degC", Min Operating Temperature="-55 degC", Package Quantity=10000, Tolerance=20%, Type (Capacitors)=X7R, Voltage Rating="25 V", Case/Package=0402, ComponentLink1Description="Manufacturer URL", ComponentLink1URL=http://www.tdk.com/, ComponentLink2Description=Datasheet, ComponentLink2URL=https://ciiva.com/datasheet-click-20389836?src=ciiva&sig=78734acc, DatasheetVersion=03/2015, Height="0.5 mm", Length="1 mm", Mount="Surface Mount", Mounting Technology="Surface Mount", PackageDescription="2-Pin Surface Mount Device, Body 1 x 0.5 mm", Packaging="Tape and Reel", PartNumber=C1005X7R1E103M050BB, RoHSCompliant=true, Voltage Rating (DC)="25 V", Width="0.5 mm"
C13 C14 C15 C16 C17 C18 C19 C20 C21 C22 C30 C31 C32 C33 C34 C35 C36 C37 C38 C39 C56 C57: library part CMP-2006-02799-2, "Chip Capacitor, 4.7 uF, +/- 10%, 6.3 V, -55 to 85 degC, 0603 (1608 Metric), RoHS, Tape and Reel", Capacitance="4.7 uF", Case Code (Imperial)=0603, Case Code (Metric)=1608, Max Operating Temperature="85 degC", Min Operating Temperature="-55 degC", Package Quantity=4000, Tolerance=10%, Type (Capacitors)=X5R, Voltage Rating="6.3 V", Voltage Rating (DC)="3 V", Case/Package=0603, ComponentLink1Description="Manufacturer URL", ComponentLink1URL=http://www.murata.com/, ComponentLink2Description=Datasheet, ComponentLink2URL=http://psearch.en.murata.com/capacitor/product/GRM188R60J475KE19%23.pdf, DatasheetVersion=08/2016, Height="0.8 mm", Length="1.6 mm", Mount="Surface Mount", Mounting Technology="Surface Mount", PackageDescription="2-Pin Surface Mount Device, Body 1.6 x 0.8 mm", Packaging="Tape and Reel", PartNumber=GRM188R60J475KE19D, Radiation Hardening=No, REACH SVHC="No SVHC", RoHSCompliant=true, Width="0.8 mm"
C23 C24 C25 C26 C27 C28 C29 C40 C41 C42 C43 C44 C45 C46 C47 C48 C49 C50 C51 C52 C53 C54 C55 C58 C59 C60 C61 C62 C63 C64 C65 C66 C67 C68 C69 C70 C71 C72 C73 C74 C75 C76 C77 C78 C79 C80 C81: library part CMP-1663-00006-2, "Chip Capacitor, 1 uF, +/- 10%, 25 V, -55 to 85 degC, 0402 (1005 Metric), RoHS, Tape and Reel", Capacitance="1 uF", Case Code (Imperial)=0402, Case Code (Metric)=1005, Max Operating Temperature="85 degC", Min Operating Temperature="-55 degC", Package Quantity=1, Tolerance=10%, Case/Package=0402, ComponentLink1Description="Manufacturer URL", ComponentLink1URL=http://www.tdk.com/, ComponentLink2Description=Datasheet, ComponentLink2URL=https://product.tdk.com/info/en/catalog/datasheets/mlcc_commercial_lowprofile_en.pdf, DatasheetVersion=04/2015, Length="0.039 inch", Mounting Technology="Surface Mount", PackageDescription="2-Pin Surface Mount Device, Body 1 x 0.5 mm", Packaging="Tape and Reel", PartNumber=CGB2A1X5R1E105K033BC, RoHSCompliant=True, Width="0.02 inch"
D1: library part CMP-1721-00006-1, "DDR4 DIMM Temperature Sensor with EEPROM for SPD, 1.7 to 3.6 V, -65 to 150 degC, 8-PinTDFN, Pb-free, Tape and Reel", ComponentLink1Description="Manufacturer URL", ComponentLink1URL=http://www.microchip.com/, ComponentLink2Description=Datasheet, ComponentLink2URL=http://ww1.microchip.com/downloads/en/DeviceDoc/22327C.pdf, DatasheetVersion="Rev. C, 05/2013", Mounting Technology="Surface Mount", PackageDescription="8-Pin Thin Dual Flat No-lead Package, Body 2 x 3 mm, Pitch 0.5 mm", PartNumber=MCP98244
D2 D3 D4 D5 U1 U2 U3 U4: library part CMP-1738-00001-1, "8 Gb DDR4 SDRAM, 1 Gig x 8, 1.2 V, 0 to 95 degC, 78-Ball FBGA (WE), RoHS", ComponentLink1Description="Manufacturer URL", ComponentLink1URL=http://www.micron.com/, ComponentLink2Description=Datasheet, ComponentLink2URL=https://www.micron.com/~/media/documents/products/data-sheet/dram/ddr4/8gb_ddr4_sdram.pdf, DatasheetVersion="Rev. E, 05/2016", Mounting Technology="Surface Mount", PackageDescription="78-Ball Ball Grid Array, Body 8 x 12 mm, Pitch 0.8 mm", PartId=1, PartNumber=MT40A1G8WE-083E:B
R1: library part CMP-2002-07920-2, "Chip Resistor, 120 Ohm, +/- 5%, 0.063 W, -55 to 155 degC, 0402 (1005 Metric), RoHS, Tape and Reel", Case Code (Imperial)=0402, Case Code (Metric)=1005, Max Operating Temperature="155 degC", Min Operating Temperature="-55 degC", Package Quantity=10000, Power Rating="63 mW", Resistance="120 Ohm", Tolerance=5%, Type (Resistor)="Thick Film", Voltage Rating="50 V", Case/Package=0402, ComponentLink1Description="Manufacturer URL", ComponentLink1URL=http://www.yageo.com/, ComponentLink2Description=Datasheet, ComponentLink2URL=http://www.yageo.com/documents/recent/PYu-RC_Group_51_RoHS_L_04.pdf, DatasheetVersion="Rev. 4, 02/2016", Height="0.35 mm", Length="1 mm", Mount="Surface Mount", Mounting Technology="Surface Mount", PackageDescription="2-Pin Surface Mount Device, Body 1 x 0.5 mm", Packaging="Tape and Reel", PartNumber=RC0402JR-07120RL, Pins=2, REACH SVHC="No SVHC", RoHSCompliant=true, Voltage Rating (DC)="50 V", Width="0.5 mm"
R2: library part CMP-2002-07994-2, "Chip Resistor, 39 Ohm, +/- 5%, 0.063 W, -55 to 155 degC, 0402 (1005 Metric), RoHS, Tape and Reel", Case Code (Imperial)=0402, Case Code (Metric)=1005, Max Operating Temperature="155 degC", Min Operating Temperature="-55 degC", Package Quantity=1, Power Rating="63 mW", Resistance="39 Ohm", Tolerance=5%, Voltage Rating="50 V", Case/Package=0402, ComponentLink1Description="Manufacturer URL", ComponentLink1URL=http://www.yageo.com/, ComponentLink2Description=Datasheet, ComponentLink2URL=http://www.yageo.com/documents/recent/PYu-RC_Group_51_RoHS_L_04.pdf, DatasheetVersion="Rev. 4, 02/2016", Height="0.35 mm", Length="1 mm", Mount="Surface Mount", Mounting Technology="Surface Mount", PackageDescription="2-Pin Surface Mount Device, Body 1 x 0.5 mm", Packaging="Cut Tape", PartNumber=RC0402JR-0739RL, Pins=2, REACH SVHC="No SVHC", RoHSCompliant=true, Voltage Rating (DC)="50 V", Width="0.5 mm"
R3: library part CMP-2002-00578-3, "Chip Resistor, 75 Ohm, +/- 5%, 100 mW, -55 to 155 degC, 0402 (1005 Metric), RoHS, Tape and Reel", Case Code (Imperial)=0402, Case Code (Metric)=1005, Manufacturer="Basic Passives", Max Operating Temperature="155 degC", Min Operating Temperature="-55 degC", Package Quantity=10000, Power Rating="100 mW", Resistance="75 Ohm", Tolerance=5%, Voltage Rating="50 V", Case\/Package=0402, ComponentLink1Description="Manufacturer URL", ComponentLink1URL=http://www.panasonic.com/, ComponentLink2Description=Datasheet, ComponentLink2URL=http://industrial.panasonic.com/cdbs/www-data/pdf/RDA0000/AOA0000C84.pdf, DatasheetVersion=03/2015, Height="0.35 mm", Length="1 mm", Mount="Surface Mount", Mounting Technology="Surface Mount", PackageDescription="2-Pin Surface Mount Device, Body 1 x 0.5 mm", PackageReference=0402, Packaging="Tape and Reel", PartNumber=ERJ-2GEJ750X, Pins=2, Radiation Hardening=No, REACH SVHC=Unknown, RoHSCompliant=true, Width="0.5 mm"
R4 R5 R6 R7 R8 R9 R10 R11 R12 R13 R14 R15 R16 R17 R18 R19 R20 R21 R22 R23 R24 R25 R26 R27 R28 R29 R30 R31 R32 R33 R34 R35 R36 R37 R38 R39 R40 R41 R42 R43 R44 R45 R46 R47 R48 R49 R50 R51 R52 R53 R54 R55 R56 R57 R58 R59 R60 R61 R62 R63 R64 R65 R66 R67 R68 R69 R70 R71 R72 R73 R74 R75 R76 R77 R78 R79 R81 R82 R83 R84 R86 R87 R88 R89 R90 R91 R92 R93: library part CMP-2004-03155-3, "Chip Resistor, 15 Ohm, +/- 5%, 0.05 W, -55 to 125 degC, 0201 (0603 Metric), RoHS, Tape and Reel", Case Code (Imperial)=0201, Case Code (Metric)=0603, Max Operating Temperature="125 degC", Min Operating Temperature="-55 degC", Package Quantity=15000, Power Rating="50 mW", Resistance="15 Ohm", Tolerance=5%, Voltage Rating="25 V", Case/Package=0201, ComponentLink1Description="Manufacturer URL", ComponentLink1URL=http://www.panasonic.com/, ComponentLink2Description=Datasheet, ComponentLink2URL=http://media.digikey.com/pdf/Data%20Sheets/Panasonic%20Resistors%20Thermistors%20PDFs/ERJ%205%25.pdf, DatasheetVersion=03/2005, Height="0.23 mm", Length="0.6 mm", Mounting Technology="Surface Mount", PackageDescription="2-Pin Surface Mount Device, Body 0.6 x 0.3 mm", Packaging="Tape and Reel", PartNumber=ERJ-1GEJ150C, RoHSCompliant=true, Width="0.3 mm"
R80 R85: library part CMP-2002-07983-2, "Chip Resistor, 30 Ohm, +/- 5%, 0.063 W, -55 to 155 degC, 0402 (1005 Metric), RoHS, Tape and Reel", Case Code (Imperial)=0402, Case Code (Metric)=1005, Max Operating Temperature="155 degC", Min Operating Temperature="-55 degC", Package Quantity=10000, Power Rating="63 mW", Resistance="30 Ohm", Tolerance=5%, Voltage Rating="50 V", Case/Package=0402, ComponentLink1Description="Manufacturer URL", ComponentLink1URL=http://www.yageo.com/, ComponentLink2Description=Datasheet, ComponentLink2URL=http://www.yageo.com/documents/recent/PYu-RC_Group_51_RoHS_L_04.pdf, DatasheetVersion="Rev. 4, 02/2016", Height="0.35 mm", Length="1 mm", Mount="Surface Mount", Mounting Technology="Surface Mount", PackageDescription="2-Pin Surface Mount Device, Body 1 x 0.5 mm", Packaging="Tape and Reel", PartNumber=RC0402JR-0730RL, Radiation Hardening=No, RoHSCompliant=true, Width="0.5 mm"
R94 R95 R96 R97 R98 R99 R100 R101: library part CMP-2002-00493-3, "Chip Resistor, 240 Ohm, +/- 5%, 100 mW, -55 to 155 degC, 0402 (1005 Metric), RoHS, Tape and Reel", Case Code (Imperial)=0402, Case Code (Metric)=1005, Manufacturer="Basic Passives", Max Operating Temperature="155 degC", Min Operating Temperature="-55 degC", Package Quantity=10000, Power Rating="100 mW", Resistance="240 Ohm", Tolerance=5%, Voltage Rating="50 V", Case\/Package=0402, ComponentLink1Description="Manufacturer URL", ComponentLink1URL=http://www.panasonic.com/, ComponentLink2Description=Datasheet, ComponentLink2URL=http://industrial.panasonic.com/cdbs/www-data/pdf/RDA0000/AOA0000C84.pdf, DatasheetVersion=03/2015, Height="0.35 mm", Length="1 mm", Mount="Surface Mount", Mounting Technology="Surface Mount", PackageDescription="2-Pin Surface Mount Device, Body 1 x 0.5 mm", PackageReference=0402, Packaging="Tape and Reel", PartNumber=ERJ-2GEJ241x, Pins=2, Radiation Hardening=No, REACH SVHC=Yes, RoHSCompliant=true, Width="0.5 mm"
RN1 RN2 RN3 RN4 RN5 RN6 RN7: library part CMP-1734-00001-1, "Chip Resistor Array, 36 Ohm, +/- 5%, 62.5 mW, -55 to 125 degC, 8-Pin SMD, RoHS, Tape and Reel", Case Code (Metric)=2010, Case/Package=0804, Max Operating Temperature="125 degC", Min Operating Temperature="-55 degC", Package Quantity=10000, Power Rating="120 mW", Resistance="36 Ohm", Tolerance=5%, Type (Resistor)="Thick Film", ComponentLink1Description="Manufacturer URL", ComponentLink1URL=http://www.bourns.com/, ComponentLink2Description=Datasheet, ComponentLink2URL=http://www.bourns.com/docs/Product-Datasheets/CAY10.pdf, DatasheetVersion=01/2015, Height="0.018 inch", Length="0.079 inch", Mount="Surface Mount", Mounting Technology="Surface Mount", PackageDescription="8-Pin Surface Mount Device, Body 2 x 1 mm, Pitch 0.5 mm", Packaging="Tape and Reel", PartNumber=CAY10-360J4LF, Pins=8, RoHSCompliant=true, Width="0.039 inch"
X1: library part CMP-0001-00005-1, "Golden finger, SODIMM, Dual, Staggered, Pitch 0.5mm, 260-Position", Package Reference=SODIMM-GF-2D-500-1K-S260, Class Name="Edge Connector", Mating Connector=AS0A823-H4SB-7H, Publisher=Altium, System=Connector

## Nets (pads, with @x,y where several pads share a name; then routed paths per layer and width w, separated by ;. In a path a pad name is that pad's centre, name@x,y a point inside that pad or via, vN(x,y) a via of type N, cw(c..) or ccw(c..) an arc to the next point about the centre after c; other vN are vias at no path point)
A00: D2.L3 D3.L3 D4.L3 D5.L3 RN5.3 U1.L3 U2.L3 U3.L3 U4.L3 X1.144
A01: D2.L7 D3.L7 D4.L7 D5.L7 RN5.2 U1.L7 U2.L7 U3.L7 U4.L7 X1.133
A02: D2.M3 D3.M3 D4.M3 D5.M3 RN7.1 U1.M3 U2.M3 U3.M3 U4.M3 X1.132
A03: D2.K7 D3.K7 D4.K7 D5.K7 RN7.4 U1.K7 U2.K7 U3.K7 U4.K7 X1.131
A04: D2.K3 D3.K3 D4.K3 D5.K3 RN5.1 U1.K3 U2.K3 U3.K3 U4.K3 X1.128
A05: D2.L8 D3.L8 D4.L8 D5.L8 RN7.2 U1.L8 U2.L8 U3.L8 U4.L8 X1.126
A06: D2.L2 D3.L2 D4.L2 D5.L2 RN2.4 U1.L2 U2.L2 U3.L2 U4.L2 X1.127
A07: D2.M8 D3.M8 D4.M8 D5.M8 RN7.3 U1.M8 U2.M8 U3.M8 U4.M8 X1.122
A08: D2.M2 D3.M2 D4.M2 D5.M2 RN5.4 U1.M2 U2.M2 U3.M2 U4.M2 X1.125
A09: D2.M7 D3.M7 D4.M7 D5.M7 RN6.1 U1.M7 U2.M7 U3.M7 U4.M7 X1.121
A10: D2.J3 D3.J3 D4.J3 D5.J3 RN3.1 U1.J3 U2.J3 U3.J3 U4.J3 X1.146
A11: D2.N2 D3.N2 D4.N2 D5.N2 RN6.4 U1.N2 U2.N2 U3.N2 U4.N2 X1.120
A12: D2.J7 D3.J7 D4.J7 D5.J7 RN4.3 U1.J7 U2.J7 U3.J7 U4.J7 X1.119
A13: D2.N8 D3.N8 D4.N8 D5.N8 RN6.3 U1.N8 U2.N8 U3.N8 U4.N8 X1.158
A14: D2.H2 D3.H2 D4.H2 D5.H2 RN2.3 U1.H2 U2.H2 U3.H2 U4.H2 X1.151
A15: D2.H7 D3.H7 D4.H7 D5.H7 RN3.4 U1.H7 U2.H7 U3.H7 U4.H7 X1.156
A16: D2.H8 D3.H8 D4.H8 D5.H8 RN4.2 U1.H8 U2.H8 U3.H8 U4.H8 X1.152
ACT: D2.H3 D3.H3 D4.H3 D5.H3 RN3.3 U1.H3 U2.H3 U3.H3 U4.H3 X1.114
ALERT: D2.L9 D3.L9 D4.L9 D5.L9 R2.1 U1.L9 U2.L9 U3.L9 U4.L9 X1.116
BA0: D2.K2 D3.K2 D4.K2 D5.K2 RN2.2 U1.K2 U2.K2 U3.K2 U4.K2 X1.150
BA1: D2.K8 D3.K8 D4.K8 D5.K8 RN4.1 U1.K8 U2.K8 U3.K8 U4.K8 X1.145
BG0: D2.J2 D3.J2 D4.J2 D5.J2 RN3.2 U1.J2 U2.J2 U3.J2 U4.J2 X1.115
BG1: D2.J8 D3.J8 D4.J8 D5.J8 RN2.1 U1.J8 U2.J8 U3.J8 U4.J8 X1.113
CK0_N: C3.2 D2.F8 D3.F8 D4.F8 D5.F8 R85.1 U1.F8 U2.F8 U3.F8 U4.F8 X1.139
CK0_P: C3.1 D2.F7 D3.F7 D4.F7 D5.F7 R80.1 U1.F7 U2.F7 U3.F7 U4.F7 X1.137
CK1_N: R3.2 X1.140
CK1_P: R3.1 X1.138
CKE0: D2.G3 D3.G3 D4.G3 D5.G3 RN1.4 U1.G3 U2.G3 U3.G3 U4.G3 X1.109
DM0: R36.1 X1.12
DM0R: D2.A7 R36.2
DM1: R56.1 X1.33
DM1R: D3.A7 R56.2
DM2: R37.1 X1.54
DM2R: D4.A7 R37.2
DM3: R57.1 X1.75
DM3R: D5.A7 R57.2
DM4: R38.1 X1.178
DM4R: R38.2 U1.A7
DM5: R58.1 X1.199
DM5R: R58.2 U2.A7
DM6: R39.1 X1.220
DM6R: R39.2 U3.A7
DM7: R59.1 X1.241
DM7R: R59.2 U4.A7
DQ00: R32.1 X1.8
DQ00R: D2.B7 R32.2
DQ01: R8.1 X1.7
DQ01R: D2.D7 R8.2
DQ02: R44.1 X1.20
DQ02R: D2.D3 R44.2
DQ03: R24.1 X1.21
DQ03R: D2.C2 R24.2
DQ04: R28.1 X1.4
DQ04R: D2.D8 R28.2
DQ05: R4.1 X1.3
DQ05R: D2.E7 R4.2
DQ06: R40.1 X1.16
DQ06R: D2.D2 R40.2
DQ07: R20.1 X1.17
DQ07R: D2.E3 R20.2
DQ08: R72.1 X1.28
DQ08R: D3.E3 R72.2
DQ09: R52.1 X1.29
DQ09R: D3.D2 R52.2
DQ10: R64.1 X1.41
DQ10R: D3.D8 R64.2
DQ11: R90.1 X1.42
DQ11R: D3.E7 R90.2
DQ12: R68.1 X1.24
DQ12R: D3.C2 R68.2
DQ13: R48.1 X1.25
DQ13R: D3.D3 R48.2
DQ14: R86.1 X1.38
DQ14R: D3.D7 R86.2
DQ15: R60.1 X1.37
DQ15R: D3.B7 R60.2
DQ16: R33.1 X1.50
DQ16R: D4.D7 R33.2
DQ17: R9.1 X1.49
DQ17R: D4.B7 R9.2
DQ18: R45.1 X1.62
DQ18R: D4.D3 R45.2
DQ19: R25.1 X1.63
DQ19R: D4.C2 R25.2
DQ20: R29.1 X1.46
DQ20R: D4.E7 R29.2
DQ21: R5.1 X1.45
DQ21R: D4.D8 R5.2
DQ22: R41.1 X1.58
DQ22R: D4.D2 R41.2
DQ23: R21.1 X1.59
DQ23R: D4.E3 R21.2
DQ24: R73.1 X1.70
DQ24R: D5.D2 R73.2
DQ25: R53.1 X1.71
DQ25R: D5.E3 R53.2
DQ26: R65.1 X1.83
DQ26R: D5.D8 R65.2
DQ27: R91.1 X1.84
DQ27R: D5.E7 R91.2
DQ28: R69.1 X1.66
DQ28R: D5.D3 R69.2
DQ29: R49.1 X1.67
DQ29R: D5.C2 R49.2
DQ30: R61.1 X1.79
DQ30R: D5.B7 R61.2
DQ31: R87.1 X1.80
DQ31R: D5.D7 R87.2
DQ32: R34.1 X1.174
DQ32R: R34.2 U1.D8
DQ33: R10.1 X1.173
DQ33R: R10.2 U1.E7
DQ34: R26.1 X1.187
DQ34R: R26.2 U1.E3
DQ35: R46.1 X1.186
DQ35R: R46.2 U1.D2
DQ36: R30.1 X1.170
DQ36R: R30.2 U1.B7
DQ37: R6.1 X1.169
DQ37R: R6.2 U1.D7
DQ38: R22.1 X1.183
DQ38R: R22.2 U1.C2
DQ39: R42.1 X1.182
DQ39R: R42.2 U1.D3
DQ40: R54.1 X1.195
DQ40R: R54.2 U2.C2
DQ41: R74.1 X1.194
DQ41R: R74.2 U2.D3
DQ42: R66.1 X1.207
DQ42R: R66.2 U2.B7
DQ43: R92.1 X1.208
DQ43R: R92.2 U2.D7
DQ44: R50.1 X1.191
DQ44R: R50.2 U2.D2
DQ45: R70.1 X1.190
DQ45R: R70.2 U2.E3
DQ46: R62.1 X1.203
DQ46R: R62.2 U2.E7
DQ47: R88.1 X1.204
DQ47R: R88.2 U2.D8
DQ48: R35.1 X1.216
DQ48R: R35.2 U3.E7
DQ49: R11.1 X1.215
DQ49R: R11.2 U3.D8
DQ50: R47.1 X1.228
DQ50R: R47.2 U3.D2
DQ51: R27.1 X1.229
DQ51R: R27.2 U3.E3
DQ52: R7.1 X1.211
DQ52R: R7.2 U3.B7
DQ53: R31.1 X1.212
DQ53R: R31.2 U3.D7
DQ54: R43.1 X1.224
DQ54R: R43.2 U3.D3
DQ55: R23.1 X1.225
DQ55R: R23.2 U3.C2
DQ56: R55.1 X1.237
DQ56R: R55.2 U4.C2
DQ57: R75.1 X1.236
DQ57R: R75.2 U4.D3
DQ58: R67.1 X1.249
DQ58R: R67.2 U4.B7
DQ59: R93.1 X1.250
DQ59R: R93.2 U4.D7
DQ60: R71.1 X1.232
DQ60R: R71.2 U4.E3
DQ61: R51.1 X1.233
DQ61R: R51.2 U4.D2
DQ62: R63.1 X1.245
DQ62R: R63.2 U4.D8
DQ63: R89.1 X1.246
DQ63R: R89.2 U4.E7
DQS0_N: R12.1 X1.11
DQS0_P: R16.1 X1.13
DQS0R_N: D2.B3 R12.2
DQS0R_P: D2.C3 R16.2
DQS1_N: R76.1 X1.32
DQS1_P: R81.1 X1.34
DQS1R_N: D3.B3 R76.2
DQS1R_P: D3.C3 R81.2
DQS2_N: R13.1 X1.53
DQS2_P: R17.1 X1.55
DQS2R_N: D4.B3 R13.2
DQS2R_P: D4.C3 R17.2
DQS3_N: R77.1 X1.74
DQS3_P: R82.1 X1.76
DQS3R_N: D5.B3 R77.2
DQS3R_P: D5.C3 R82.2
DQS4_N: R14.1 X1.177
DQS4_P: R18.1 X1.179
DQS4R_N: R14.2 U1.B3
DQS4R_P: R18.2 U1.C3
DQS5_N: R78.1 X1.198
DQS5_P: R83.1 X1.200
DQS5R_N: R78.2 U2.B3
DQS5R_P: R83.2 U2.C3
DQS6_N: R15.1 X1.219
DQS6_P: R19.1 X1.221
DQS6R_N: R15.2 U3.B3
DQS6R_P: R19.2 U3.C3
DQS7_N: R79.1 X1.240
DQS7_P: R84.1 X1.242
DQS7R_N: R79.2 U4.B3
DQS7R_P: R84.2 U4.C3